# Altium PCB pcb.PcbDoc
Units mil, origin at the board's own origin, x right, y up, seen from the top; angles counter-clockwise.
Board outline 2095 x 2705 mil, 2 copper layers (Top Layer, Bottom Layer); 51 components, 35 nets, 174 pads, 0 vias.
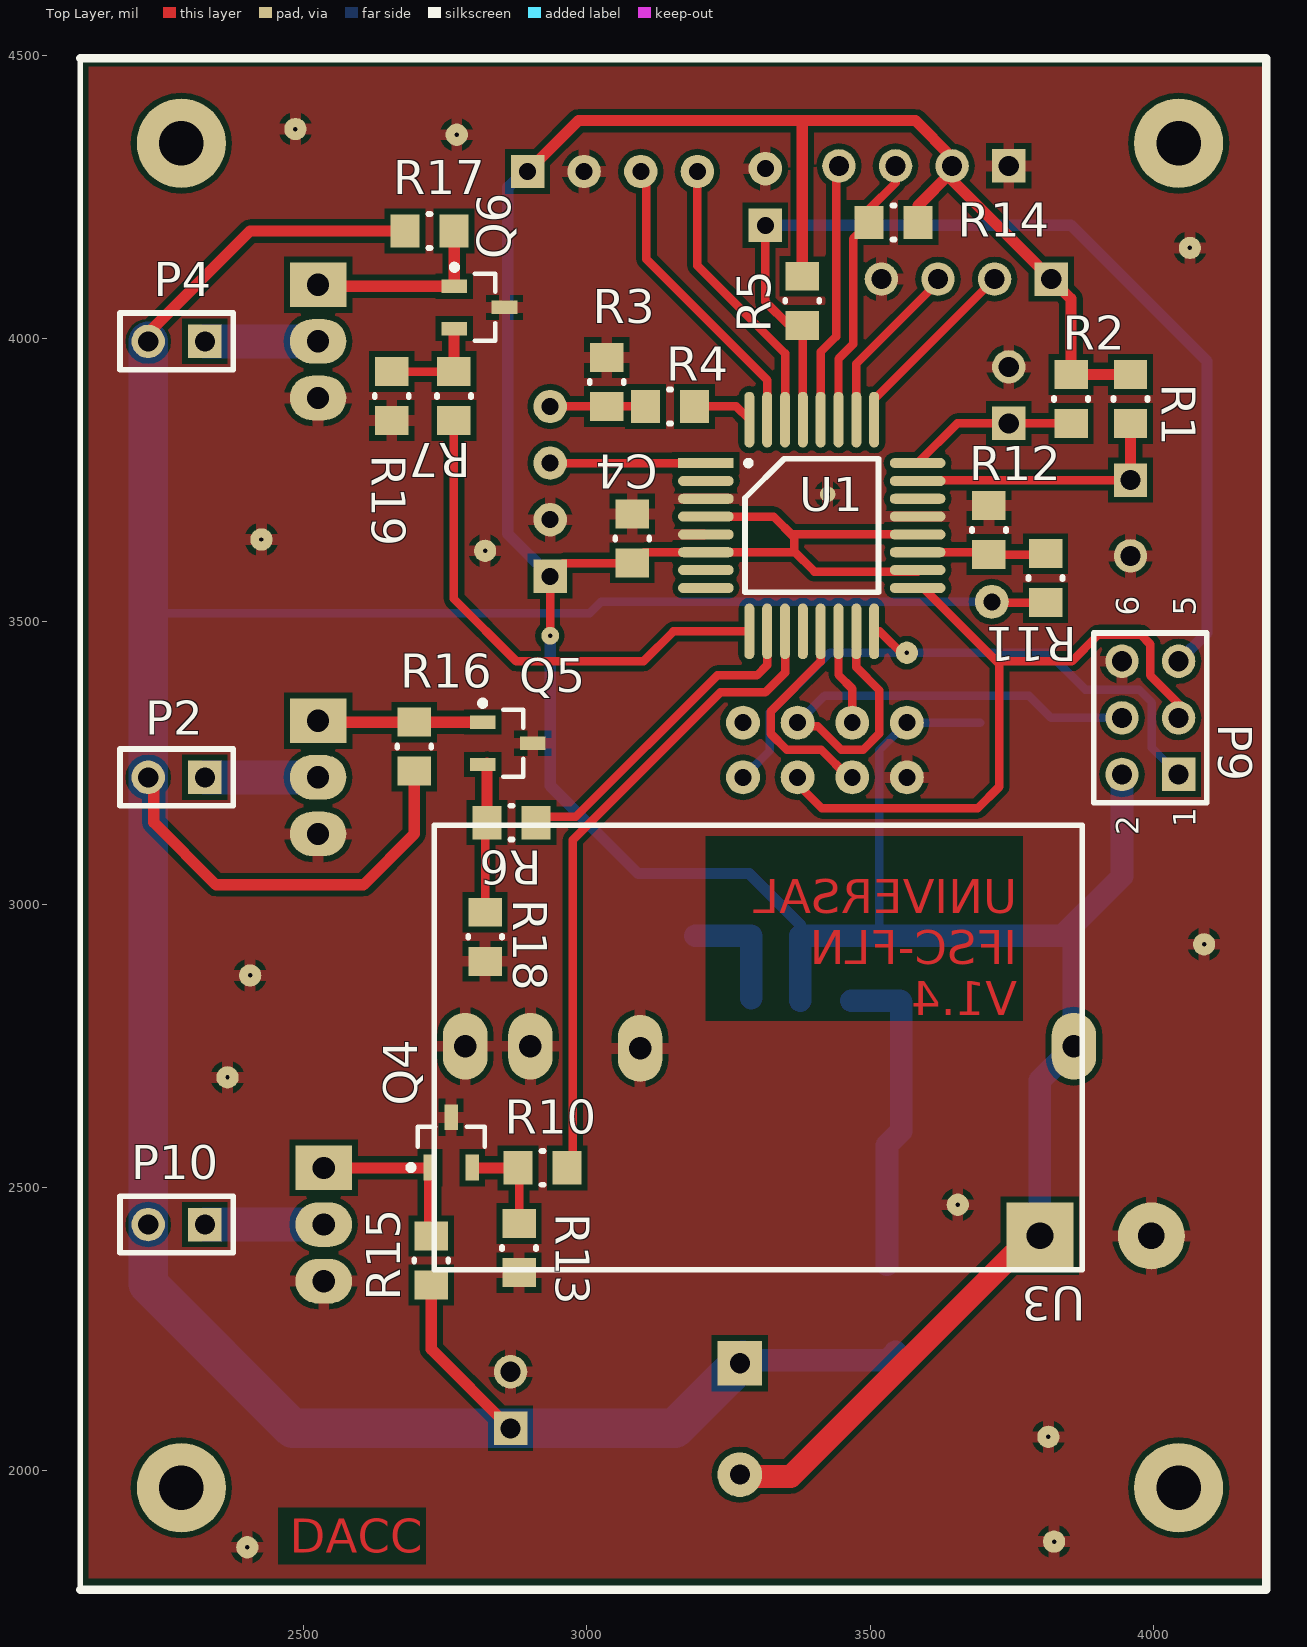
[diagram p0: Top Layer view]
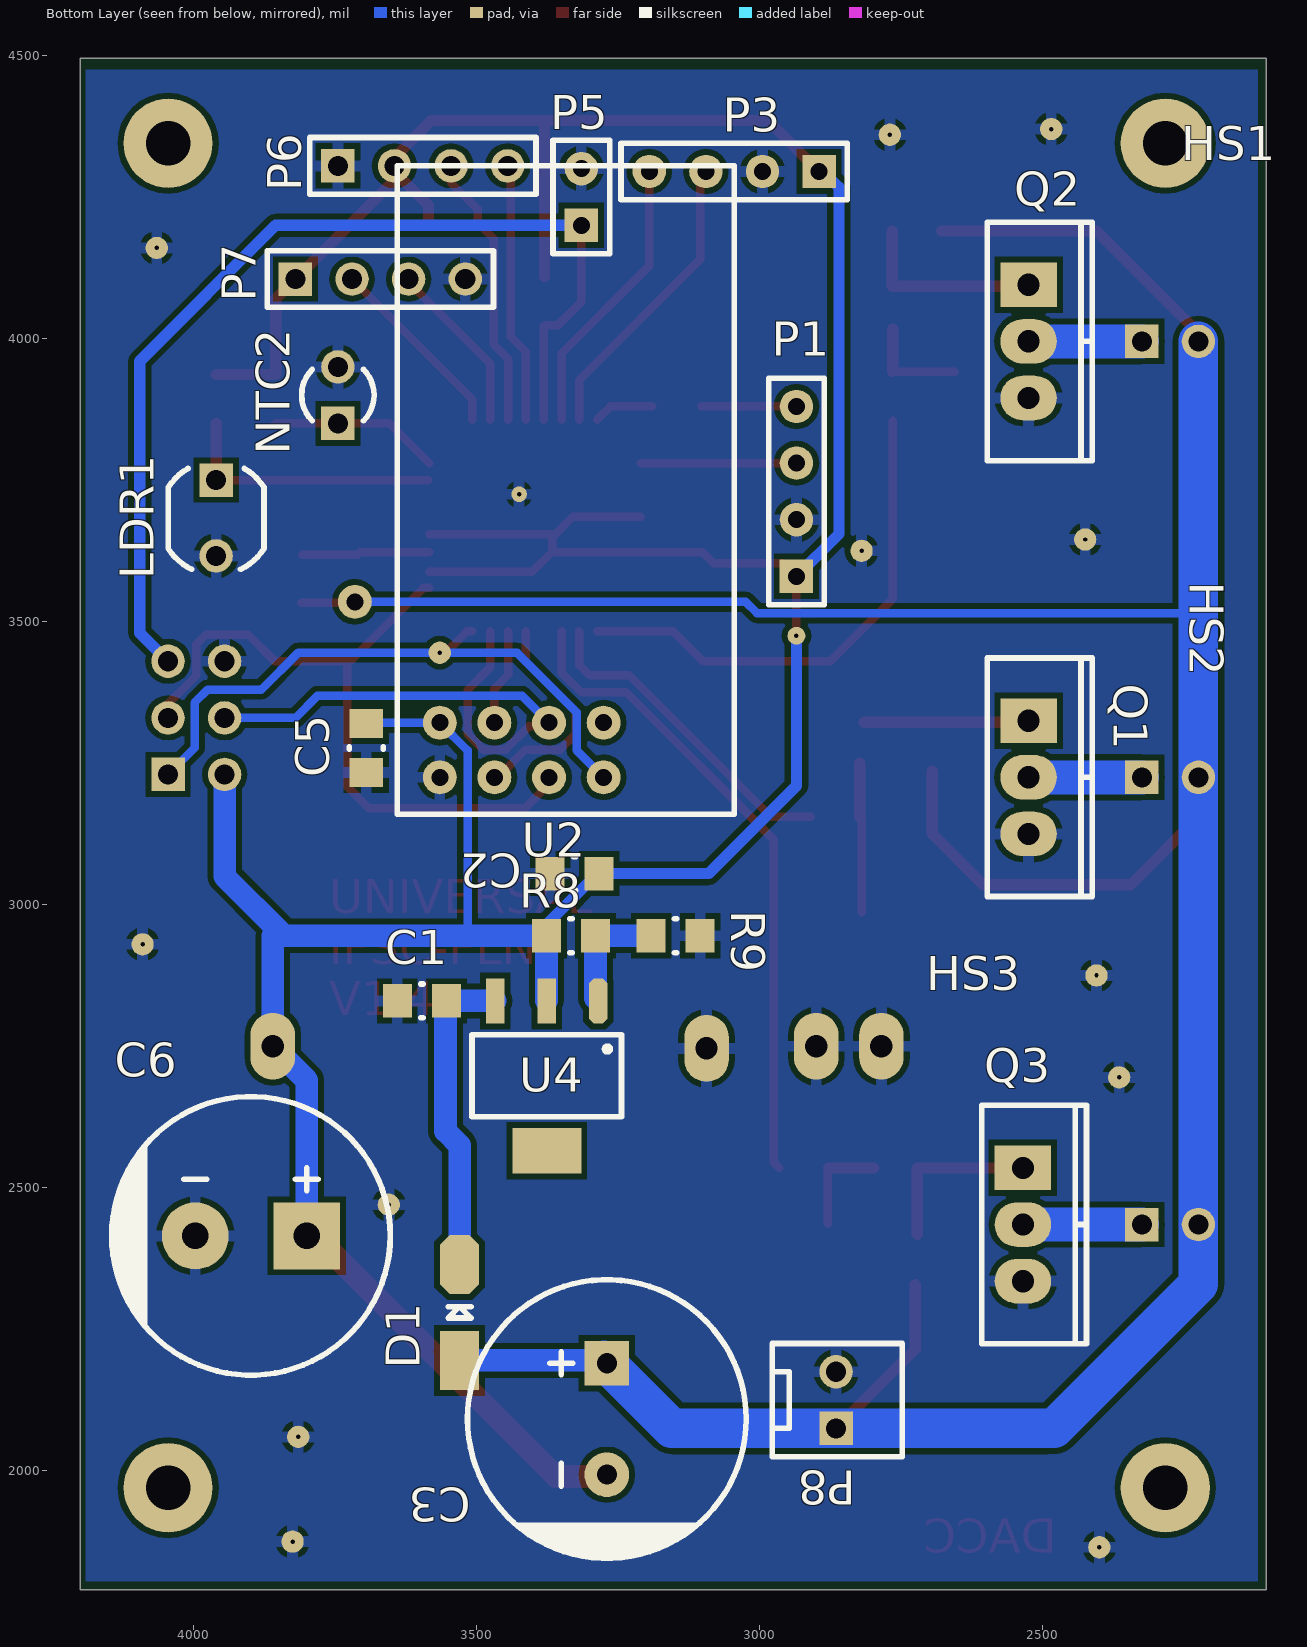
[diagram p1: Bottom Layer view, seen from below]
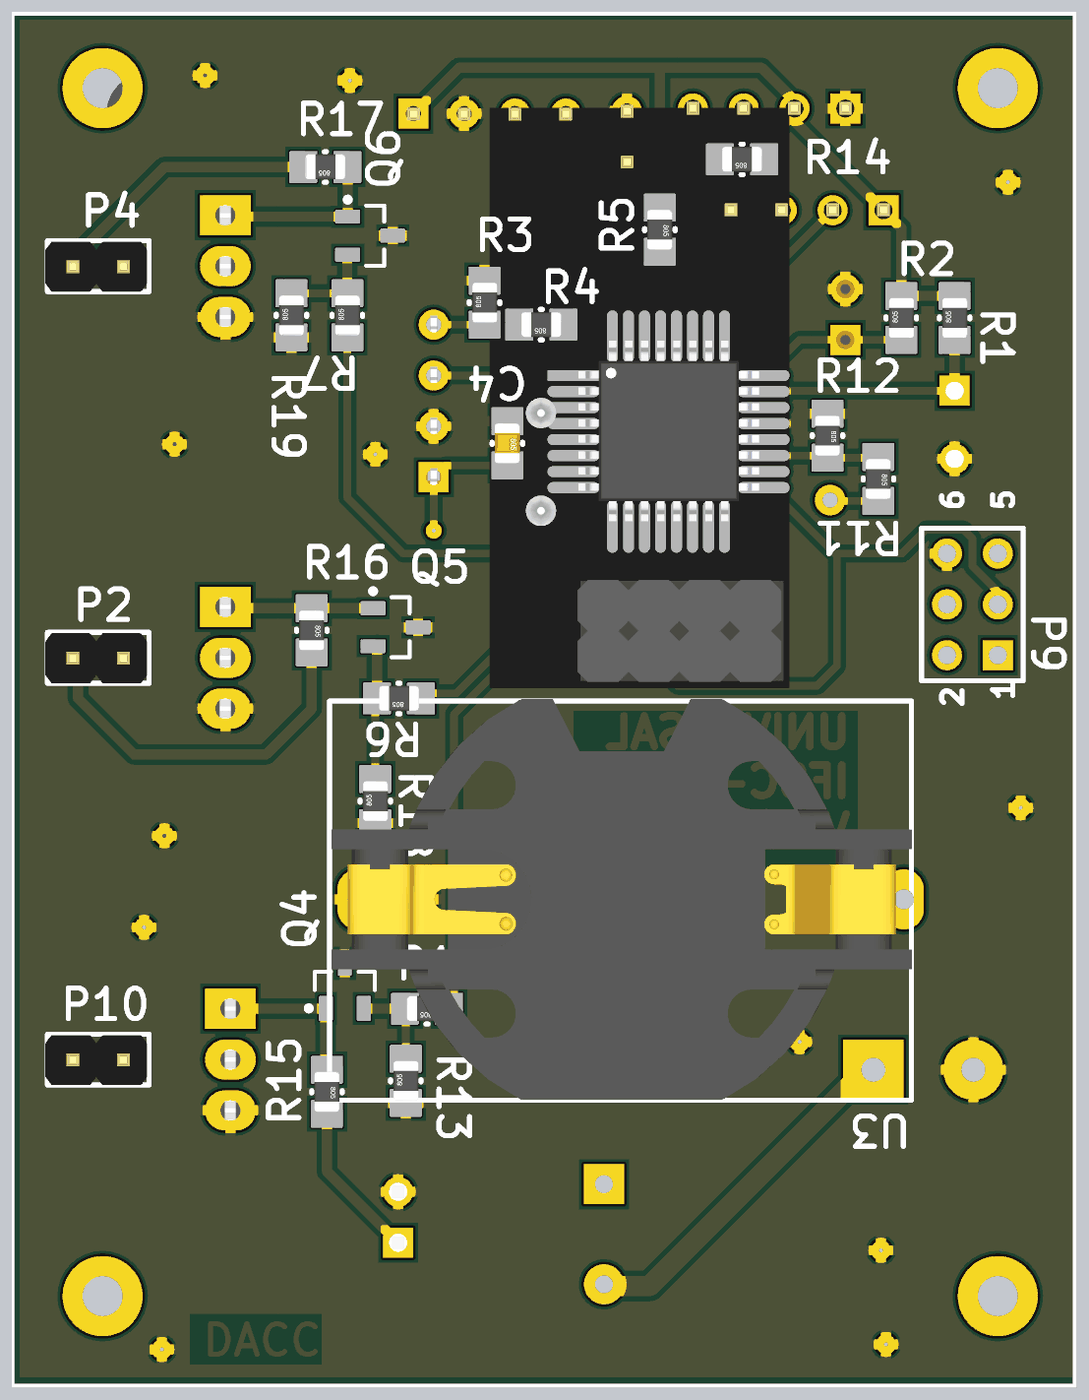
[diagram p2: 3D render of the assembled board from above, using the file's embedded part models]
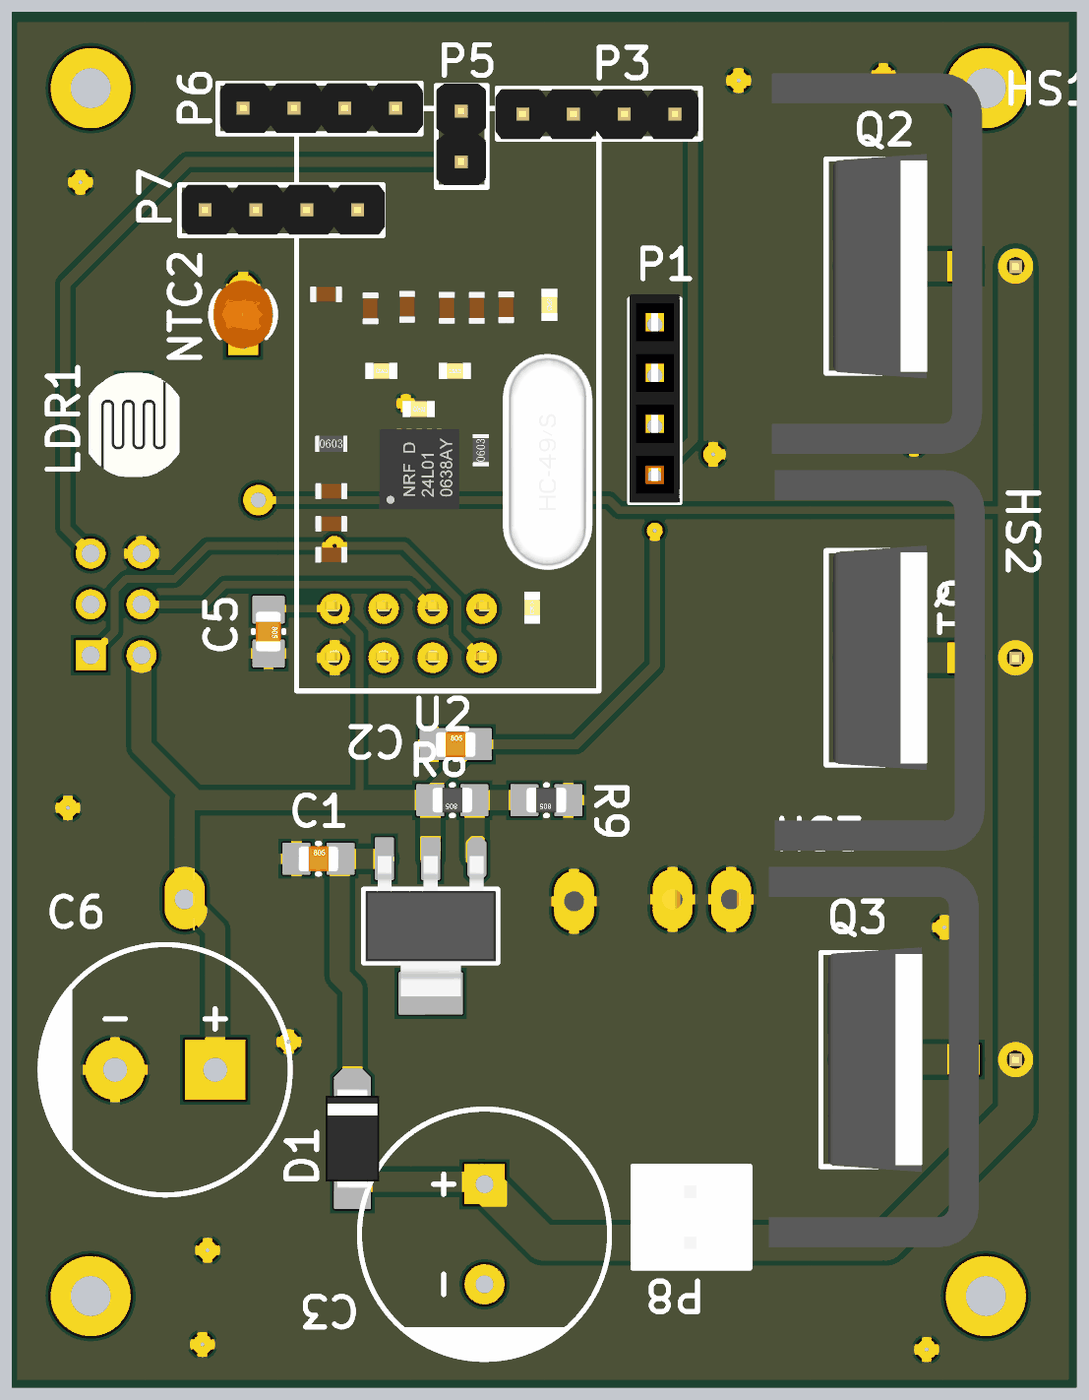
[diagram p3: 3D render of the assembled board from below, using the file's embedded part models]

## Layer stack, top to bottom
Top Solder: solder mask 0.4, Solder Resist, Dk 3.5
Top Layer: signal copper 1.4
Dielectric 1: dielectric 12.6, FR-4, Dk 4.8
Bottom Layer: signal copper 1.4
Bottom Solder: solder mask 0.4, Solder Resist, Dk 3.5

## Board outline
2105,1790 4200,1790 4200,4495 2105,4495

## Design rules (kind name [scope] priority, off if disabled: settings)
Clearance [All] p1: gap=10
DiffPairsRouting [All] p1: maxlimit=100 minlimit=10 mostfreqgap=10 toplayer_minwidth=15 toplayer_maxwidth=15 toplayer_prefwidth=15 bottomlayer_minwidth=15 bottomlayer_maxwidth=15 bottomlayer_prefwidth=15 maxuncoupledlength=500
NetAntennae [All] p1: netantennaetolerance=2
PasteMaskExpansion [All] p1: expansion=2
PlaneConnect [All] p1: planeconnectstyle=Relief reliefexpansion=20 reliefentries=4 reliefconductorwidth=20 reliefairgap=10
PolygonConnect [All] p1: connectstyle=Relief reliefconductorwidth=20 reliefentries=4 polygonreliefangle="90 Angle" airgapwidth=10
RoomDefinition schematic [InComponentClass('schematic')] p1: confinementstyle=ConfineIn formatcopy=TRUE lockcomponents=FALSE outline 7045,1060 7610,1060 7610,1380 7045,1380
RoutingVias [All] p1: holewidth=28 width=59.06 viastyle="Through Hole" minholewidth=28 minwidth=59.06 maxholewidth=28 maxwidth=59.06
SolderMaskExpansion [All] p1: expansion=5
Width [All] p1: maxlimit=60 minlimit=10 preferedwidth=15 minimp=50.000000 maximp=50.000000 favimp=50.000000
26 further rules are at their usual default settings.

## Components (designator, comment, footprint, x,y, rotation, side; value= is the part's Value field where it differs from the comment)
C1 "100nF" 0805C 3640,2830 r180 bottom
C2 "100nF" 0805C 3370,3055 r180 bottom
C3 "1000uF" CP-RAD-12.5mm-25.0mm-5.0mm 3270,2190 r270 bottom
C4 "100nF" 0805C 3080,3690 r270 top
C5 "100nF" 0805C 3695,3320 r270 bottom
C6 "1000uF" CP-RAD-12.5mm-40.0mm-5.0mm 3800,2415 r0 bottom
D1 "1N4007" DO-214AC 3530,2195 r90 bottom
HS1 "HS-TO-220" HS-TO-220-180847 2355,4000 r270 bottom
HS2 "HS-TO-220" HS-TO-220-180847 2350,3220 r270 bottom
HS3 "HS-TO-220" HS-TO-220-180847 2361.23,2440 r270 bottom
LDR1 "LDR" LDR-5mm 3960,3750 r270 bottom
NTC2 "NTC" Thermistor-100mil 3745,3850 r90 bottom
P1 "BLE" HDR-F-1x4-2.54mm-180-8.7mm 2935,3580 r90 bottom
P2 "PWM_1" HDR-M-1x2-2.54mm-180-9.2mm#1 2325,3225 r180 top
P3 "SERIAL" HDR-M-1x4-2.54mm-180-11.2mm#1 2895,4295 r0 bottom
P4 "PWM_2" HDR-M-1x2-2.54mm-180-9.2mm#1 2325,3995 r180 top
P5 "RESET" HDR-M-1x2-2.54mm-180-9.2mm#2 3315,4200 r90 bottom
P6 "I2C" HDR-M-1x4-2.54mm-180-11.2mm#2 3745,4305 r180 bottom
P7 "ADC" HDR-M-1x4-2.54mm-180-11.2mm#2 3820,4105 r180 bottom
P8 "SOURCE" KK-M-1x2-2.54mm-180 2865,2075 r90 bottom
P9 "ICSP" HDR-M-2x3-2.54mm-180-9.2mm 4045,3230 r90 top
P10 "PWM_1" HDR-M-1x2-2.54mm-180-9.2mm#1 2325,2435 r180 top
Q1 "MOSFET-N" TO-220/123 2525,3325 r270 bottom
Q2 "MOSFET-N" TO-220/123 2525,4095 r270 bottom
Q3 "MOSFET-N" TO-220/123 2535,2535 r270 bottom
Q4 "QNPN" SOT-23B_N 2760,2580 r90 top
Q5 "QNPN" SOT-23B_N 2860,3285 r0 top
Q6 "QNPN" SOT-23B_N 2810,4055 r0 top
R1 "1k" 0805R 3960,3850 r90 top
R2 "10k" 0805R 3855,3850 r90 top
R3 "0R" 0805R 3035,3880 r90 top
R4 "0R" 0805R 3190,3880 r180 top
R5 "10k" 0805R 3380,4110 r270 top
R6 "2k2R" 0805R 2910,3145 r180 top
R7 "2k2R" 0805R 2765,3855 r90 top
R8 "220R" 0805R 3290,2945 r0 bottom
R9 "360R" 0805R 3105,2945 r0 bottom
R10 "2k2R" 0805R 2965,2535 r180 top
R11 "Res" 0805R 3810,3620 r270 top
R12 "Res" 0805R 3710,3705 r270 top
R13 "10k" 0805R 2880,2350 r90 top
R14 "4k7" 0805R 3585,4205 r180 top
R15 "10k" 0805R 2725,2415 r270 top
R16 "10k" 0805R 2695,3322.4 r270 top
R17 "10k" 0805R 2765,4190 r180 top
R18 "10k" 0805R 2820,2900 r90 top
R19 "10k" 0805R 2655,3855 r90 top
U1 "ATmega328A-AU" TQFP32-7.0mm(0.8mm) 3210,3780 r0 top
U2 "nRF24l01" nRF24l01 3565,3225 r180 bottom
U3 "CR2032" CR2032 3445,3205 r180 top
U4 "LM317" SOT-223/4 3285,2830 r0 bottom

## Footprints (in the part's own frame and the unit in brackets; to place one, negate y for a bottom-side part, rotate by r counter-clockwise, add the part's x,y. Pads: shape width x height; smd on the part's side, far side on the other; paste and mask are expansions set on the pad)
0805C [mm] "Chip Capacitor; Body 2 x 1.3 mm (LxW typ)"
  rect 1.3x1.5 smd: 1(0,0) 2(2.2,0)
  silkscreen extent 1.05,-0.76 1.15,0.76, body extent 0.1,-0.64 2.1,0.61, height 0.78
0805R [mm] "Chip Resistor; Body 2 x 1.3 mm (LxW typ)"
  rect 1.3x1.5 smd: 1(0,0) 2(2.2,0)
  silkscreen extent 1.05,-0.76 1.15,0.76, body extent 0.1,-0.64 2.1,0.62, height 0.78
CP-RAD-12.5mm-25.0mm-5.0mm [mm] "Radial Capacitor; D 12.5mm; L 25.0mm; P 5.0mm"
  rect 2x2 hole 0.9: 1(0,0)
  round 2 hole 0.9: 2(5,0)
  silkscreen extent -3.75,-6.25 8.75,6.25
CP-RAD-12.5mm-40.0mm-5.0mm [mm] "Radial Capacitor; D 12.5mm; L 40.0mm; P 5.0mm"
  rect 3x3 hole 1.2: 1(0,0)
  round 3 hole 1.2: 2(5,0)
  silkscreen extent -3.75,-6.25 8.75,6.25
CR2032 [mm] "BATT"
  oval 2x3 hole 1: GND(16.764,11.557) VCC(-10.541,11.557)
  silkscreen extent -10.92,1.65 18.16,21.59, body extent -10.94,1.56 18.06,21.56, height 5.3
DO-214AC [mm] "DO-214AC, 3D: Leszek Madej"
  rect 2.65x1.75 smd: A(0,0)
  oct 2.65x1.75 smd: K(4.3,0)
  silkscreen extent 1.91,-0.51 2.41,0.51, body extent -0.35,-1.35 4.65,1.35, height 2.15
HDR-F-1x4-2.54mm-180-8.7mm [mm] "Female Header, 1 line 4 rows, 180 degrees, 8.7 mm length"
  rect 1.5x1.5 hole 0.762: 1(0,0)
  round 1.5 hole 0.762: 2(2.54,0) 3(5.08,0) 4(7.62,0)
  silkscreen extent -1.27,-1.25 8.89,1.25, body extent -1.27,-1.25 9.14,1.25, height 8.5
HDR-M-1x2-2.54mm-180-9.2mm#1 [mm] "Male Header, 1 line 2 rows, 180 degrees, 9.2 mm length"
  rect 1.5x1.5 hole 0.9: 1(0,0)
  round 1.5 hole 0.9: 2(2.54,0)
  silkscreen extent -1.27,-1.27 3.81,1.27, body extent -1.17,-1.22 3.91,1.27, height 6.2
HDR-M-1x2-2.54mm-180-9.2mm#2 [mm] "Male Header, 1 line 2 rows, 180 degrees, 9.2 mm length"
  rect 1.5x1.5 hole 0.762: 1(0,0)
  round 1.5 hole 0.762: 2(2.54,0)
  silkscreen extent -1.27,-1.27 3.81,1.27, body extent -1.17,-1.22 3.91,1.27, height 6.2
HDR-M-1x4-2.54mm-180-11.2mm#1 [mm] "Male Header, 1 line 4 rows, 180 degrees, 11.2 mm length"
  rect 1.5x1.5 hole 0.762: 1(0,0)
  round 1.5 hole 0.762: 2(2.54,0) 3(5.08,0) 4(7.62,0)
  silkscreen extent -1.27,-1.27 8.89,1.27, body extent -1.17,-1.22 8.99,1.27, height 8.2
HDR-M-1x4-2.54mm-180-11.2mm#2 [mm] "Male Header, 1 line 4 rows, 180 degrees, 11.2 mm length"
  rect 1.5x1.5 hole 0.9: 1(0,0)
  round 1.5 hole 0.9: 2(2.54,0) 3(5.08,0) 4(7.62,0)
  silkscreen extent -1.27,-1.27 8.89,1.27, body extent -1.17,-1.22 8.99,1.27, height 8.2
HDR-M-2x3-2.54mm-180-9.2mm [mm] "Male Header, 2 lines, 3 columns, 180 degrees, 9.2 mm length"
  rect 1.5x1.5 hole 0.9: 1(0,0)
  round 1.5 hole 0.9: 2(0,2.54) 3(2.54,0) 4(2.54,2.54) 5(5.08,0) 6(5.08,2.54)
  silkscreen extent -1.27,-1.27 6.35,3.81
HS-TO-220-180847 [mil] "Heatsink TO-220 180847 180847 19x9.5x19mm"
  body extent -374,-349 374,64, height 933
KK-M-1x2-2.54mm-180 [mm] "Molex KK Male Header, 2 rows, 180 degrees, 3D Andrew Mellor"
  rect 1.5x1.5 hole 0.9: 1(0,0)
  round 1.5 hole 0.9: 2(2.54,0)
  silkscreen extent -1.27,-2.97 3.81,2.87, body extent -1.27,-2.97 3.81,2.87, height 11.7
LDR-5mm [mm] "Light Dependant Resistor 5 mm; 3D Saeid Jorablo"
  rect 1.5x1.5 hole 0.9: 1(0,0)
  round 1.5 hole 0.9: 2(3.4,0)
  silkscreen extent -0.52,-2.15 4.01,2.15, body extent -0.91,-2.17 4.3,2.13, height 2.24
nRF24l01 [mil]
  round 60 hole 30: CE(96.46,0) CSN(96.46,96.46) GND(0,0) IRQ(289.37,96.46) MISO(289.37,0) MOSI(192.91,96.46) SCK(192.91,0) VCC(0,96.46)
  silkscreen extent -75,-65 520,1080, body extent -70,-60 520,1082, height 138
SOT-23B_N [mm] "SOT23, 3-Leads, Body 2.9x1.3mm, Pitch 0.95mm, Lead Span 2.4mm, IPC Medium Density"
  rect 1.15x0.6 smd: 1(-1.125,0.95) 2(-1.125,-0.95) 3(1.125,0)
  silkscreen extent -1.25,-1.5 0.7,1.92, body extent -0.7,-1.5 0.7,1.5, height 1.14
SOT-223/4 [mil] "SOT-223 DCY"
  oct 33x80 smd: 1(0,0)
  rect 33x80 smd: 2(91,0) 3(182,0)
  rect 122x80 smd: 4(91,264.69)
  silkscreen extent -41,60 223,205, body extent -37,-5 219,271, height 65
Thermistor-100mil [mm] "Thermistor 100 mil"
  rect 1.5x1.5 hole 0.9: 1(0,0)
  round 1.5 hole 0.9: 2(2.54,0)
  silkscreen extent 0.12,-1.63 2.42,1.63, body extent -0.41,-1.5 2.97,1.5, height 8
TO-220/123 [mm] "TO, Thru-Hole, Vertical, Heatsink Mounted; 3 In-Line Leads; Pitch 2.54 mm"
  rect 2x2.54 hole 1: 1(0,0)
  oval 2x2.54 hole 1: 2(2.54,0) 3(5.08,0)
  silkscreen extent -2.81,-1.85 7.89,2.85, body extent -3.07,-1.49 8.15,3.2, height 21.13
TQFP32-7.0mm(0.8mm) [mm] "Thin Quad Flat Pack 32 pin; 3D André L'Hérault"
  rect 2.5x0.45 smd: 1(0,0)
  oval 2.5x0.45 smd: 2(0,-0.8) 3(0,-1.6) 4(0,-2.4) 5(0,-3.2) 6(0,-4) 7(0,-4.8) 8(0,-5.6) 17(9.5,-5.6) 18(9.5,-4.8) 19(9.5,-4) 20(9.5,-3.2) 21(9.5,-2.4) 22(9.5,-1.6) 23(9.5,-0.8) 24(9.5,0)
  oval 0.45x2.5 smd: 9(1.95,-7.55) 10(2.75,-7.55) 11(3.55,-7.55) 12(4.35,-7.55) 13(5.15,-7.55) 14(5.95,-7.55) 15(6.75,-7.55) 16(7.55,-7.55) 25(7.55,1.95) 26(6.75,1.95) 27(5.95,1.95) 28(5.15,1.95) 29(4.35,1.95) 30(3.55,1.95) 31(2.75,1.95) 32(1.95,1.95)
  silkscreen extent 1.76,-5.79 7.74,0.19, body extent 0.25,-7.28 9.27,1.74, height 1.35

## Part data
C1 C2 C4 C5: library part Capacitor, "Capacitor"
C3 C6: library part Capacitor-Electrolytic, "Electrolytic Capacitor"
D1: library part RS1A, "1 A Fast Rectifier"
HS1 HS2 HS3: "Heatsink TO-220"
LDR1: "Ligh Dependant Resistor"
NTC2: "Negative Temperature Coefficient Thermistor"
P1 P3 P6 P7: library part Header_1x4, "Header, 1 Line, 4 Columns, 4 Pins"
P2 P4 P5 P10: library part Header_1x2, "Header, 1 Line, 2 Columns, 2 Pins"
P8: library part KK_1x2, "KK Header, 1 Line, 2 Columns, 2 Pins"
P9: library part Header_2x3, "Header, 2 Lines, 3 Columns, 6 Pins"
Q1 Q2 Q3: "N-Channel MOSFET"
Q4 Q5 Q6: "NPN Bipolar Transistor"
R1 R2 R3 R4 R5 R6 R7 R8 R9 R10 R13 R14 R15 R16 R17 R18 R19: library part Resistor, "Resistor"
R11 R12: library part Res1, "Resistor"
U1: "8-bit AVR Microcontroller with 32 KB In-System Programmable Flash"
U4: "3-Terminal 1.5 A Positive Adjustable Voltage Regulator"

## Free pads (board coordinates)
  round 39.37 hole 7.87: 2(3565,3445) 11(2365,2695) 11(2400,1865) 11(2405,2875) 11(2425,3645) 11(2485,4370) 11(3655,2470) 11(3815,2060) 11(3825,1875) 11(4065,4160) 11(4090,2930) 13(2820,3625) 14(2770,4360)
  round 60 hole 30: 9(3715,3535)
  round 31.5 hole 7.87: 10(2935,3475)
  oval 78.74x118.11 hole 39.37: 11(3093.83,2746.17) 17(2900,2750)
  round 157.48 hole 78.74: 15(2283.46,1970) 15(2283.46,4345) 15(4045,1970) 15(4045,4345)
  round 27.56 hole 7.87: 16(3425,3725)

## Nets (pads, with @x,y where several pads share a name; then routed paths per layer and width w, separated by ;. In a path a pad name is that pad's centre, name@x,y a point inside that pad or via, vN(x,y) a via of type N, cw(c..) or ccw(c..) an arc to the next point about the centre after c; other vN are vias at no path point)
3V3: C2.2 C3.2 C4.2 C5.1 C6.1 P1.1 P3.1 P6.2 P7.1 P9.2 pad.10 R1.2 R2.2 R5.1 R8.2 R14.1 U1.4 U1.6 U1.18 U1.20 U2.VCC U3.VCC U4.2 | length 7270.4
  Top Layer w15: pad.10 P1.1 2958.39,3603.39 C4.2 3081.77,3603.39 3100.91,3622.52 U1.6 3365.98,3622.52 ; U1.4 3329.49,3685.51 3365.98,3649.02 3365.98,3624.02 3401.61,3588.39 U1.18@3584.02,3588.39 ; 3365.98,3654.02 U1.20 ; P6.2@3645,4280 P6.2 ; P6.2@3645,4295 P6.2 ; P6.2@3645,4320 P6.2
  Top Layer w20: P3.1 2985,4385 3580,4385 P6.2@3645,4320 ; R5.1 3380,4385 ; R14.1 3585,4235 P6.2@3645,4295 ; P6.2@3645,4280 P7.1 3855,4070 R2.2 R1.2
  Top Layer w40: C3.2@3270,1990 3360,1990 3785,2415 C6.1
  Bottom Layer w15: U4.2 U4.2@3376.61,2830.61 ; 3516.04,2945 3516.04,3272.5 U2.VCC C5.1@3695,3321.46
  Bottom Layer w20: P3.1@2887.97,4295 2860,4267.03 2860,3655 P1.1 ; pad.10 2935,3210 3090,3055 C2.2 3286.6,3055 3376.61,2964.98 R8.2
  Bottom Layer w40: U4.2@3376.61,2830.61 R8.2 3516.04,2945 3840,2945 3945,3050 P9.2 ; C6.1 3800,2690 U3.VCC 3860,2945
GND: C1.1 C2.1 C4.1 C5.2 C6.2 LDR1.2 NTC2.2 P1.2 P3.2 P5.2 P6.1 P7.4 P8.2 P9.6 pad.11 pad.13 pad.14 pad.16 pad.17 Q1.3 Q2.3 Q3.3 Q4.3 Q5.3 Q6.3 R3.2 R9.1 R12.1 R13.1 R18.1 R19.1 U1.3 U1.5 U1.21 U2.GND U3.GND
NetC1_2: C1.2 D1.K U4.3 | length 560.8
  Bottom Layer w40: U4.3 C1.2 ; D1.K 3530,2575 3555,2600 C1.2@3555,2828.39
NetLDR1_1: LDR1.1 R1.1 U1.23 | length 474.5
  Top Layer w15: U1.23@3585.51,3750 LDR1.1
  Top Layer w20: LDR1.1 R1.1
NetNTC2_1: NTC2.1 R2.1 U1.24 | length 303.5
  Top Layer w15: U1.24 3654.02,3850 3730,3850 R2.1 R2.1@3857.5,3847.5
NetP1_3: P1.3 U1.1 | length 275
  Top Layer w15: P1.3 U1.1
NetP1_4: P1.4 R3.1 R4.2 | length 168.4
  Top Layer w15: P1.4 R3.1 R4.2
NetP2_1: P2.1 Q1.2 | length 200
  Bottom Layer w60: P2.1 Q1.2
NetP3_3: P3.3 U1.31 | length 530.7
  Top Layer w15: P3.3 3105,4285 3105,4140 3318.27,3926.73 U1.31
NetP3_4: P3.4 U1.30 | length 502.3
  Top Layer w15: P3.4 3195,4128.52 3349.76,3973.76 U1.30
NetP4_1: P4.1 Q2.2 | length 200
  Bottom Layer w60: P4.1 Q2.2
NetP5_1: P5.1 P9.5 R5.2 U1.29 | length 1818.6
  Top Layer w15: P5.1@3305,4200 3315,4190 3315,4065 3356.61,4023.39 R5.2 3381.26,4022.13 U1.29
  Bottom Layer w20: P5.1 3855,4200 4095,3960 4095,3480 P9.5
NetP6_3: P6.3 R14.2 U1.27 | length 490
  Top Layer w15: U1.27 3444.25,3964.25 3470,3990 3470,4176.61 R14.2 3498.39,4228.39 3545,4275 P6.3
NetP6_4: P6.4 U1.28 | length 458.7
  Top Layer w15: U1.28 3412.76,3976.28 3440,4003.52 3440,4290 P6.4@3450,4300
NetP7_2: P7.2 U1.25 | length 336.4
  Top Layer w15: U1.25 3507.24,3892.24 P7.2
NetP7_3: P7.3 U1.26 | length 308
  Top Layer w15: U1.26 3475.75,3955.75 3620,4100 P7.3
NetP9_1: P9.1 pad.2 U1.16 U2.MISO | length 1123.3
  Top Layer w15: U1.16 3517.24,3482.76 3565,3435 pad.2
  Bottom Layer w15: U2.MISO 3323.13,3272.5 3323.13,3339.68 3428.45,3445 pad.2 3815,3445 3880,3380 3975,3380 3997.97,3357.03 3997.97,3277.03 P9.1
NetP9_3: P9.3 U1.17 U2.SCK | length 1267.4
  Top Layer w15: U2.SCK 3372.09,3212.91 3415,3170 3690,3170 3728.23,3208.23 3728.23,3430 3856.48,3430 3903.51,3477.03 3977.97,3477.03 3995,3460 3995,3405 4045,3355 P9.3 ; U1.17 3594,3559.53 3728.23,3425.3
NetP9_4: P9.4 U1.15 U2.MOSI | length 986.3
  Top Layer w15: U2.MOSI 3377.82,3327.18 3390,3315 3407.82,3315 3448.87,3273.96 3488.22,3273.96 3516.04,3301.78 3516.04,3378.97 3475.75,3419.27 U1.15
  Bottom Layer w15: U2.MOSI 3419.59,3368.96 3781.04,3368.96 3820,3330 P9.4
NetP10_1: P10.1 Q3.2 | length 210
  Bottom Layer w60: P10.1 Q3.2
NetQ1_2: Q1.1 Q5.1 R16.1 | length 288.1
  Top Layer w20: Q1.1@2527.6,3322.4 Q5.1
NetQ2_2: Q2.1 Q6.1 R17.1 | length 335
  Top Layer w20: Q2.1@2527.6,4092.4 Q6.1 R17.1@2765.71,4189.29
NetQ3_2: Q3.1 Q4.1 R15.1 | length 307.2
  Top Layer w15: Q3.1 Q3.1@2537.4,2537.4
  Top Layer w20: Q3.1 2721.89,2535 R15.1@2721.89,2418.11
NetQ4_2: Q4.2 R10.2 R13.2 | length 177
  Top Layer w15: R13.2 R10.2@2880,2533.39
  Top Layer w20: Q4.2@2798.11,2535 R10.2
NetQ5_2: Q5.2 R6.2 R18.2 | length 260.3
  Top Layer w15: R18.2 R6.2@2820,3151.61
  Top Layer w20: R6.2@2823.39,3155 Q5.2@2823.39,3250.28
NetQ6_2: Q6.2 R7.2 R19.2 | length 185.3
  Top Layer w15: R19.2 R7.2
  Top Layer w20: R7.2 Q6.2@2765,4016.89
NetR4_1: R4.1 U1.32 | length 106.4
  Top Layer w15: R4.1 3263.54,3880 U1.32
NetR6_1: R6.1 U1.10 | length 578.9
  Top Layer w15: R6.1@2910,3155 2980,3155 3230,3405 3300,3405 3318.27,3423.27 U1.10
NetR7_1: R7.1 U1.9 | length 904.2
  Top Layer w15: R7.1 2765,3540 2875,3430 3100,3430 3152.76,3482.76 U1.9
NetR8_1: R8.1 R9.2 U4.1 | length 208.4
  Bottom Layer w40: R9.2 R8.1 U4.1@3290,2835
NetR10_1: R10.1 U1.11 | length 1153.8
  Top Layer w15: R10.1 2975,2545 2975,3114.64 3235.36,3375 3315,3375 3349.76,3409.76 U1.11
NetR11_1: R11.1 R12.2 U1.19 | length 226.1
  Top Layer w15: U1.19 3705.87,3622.52 R12.2 R11.1@3808.39,3618.39
NetU1_13: U1.13 U2.CE | length 387.2
  Top Layer w15: U1.13 3412.76,3429.3 3324.59,3341.13 3324.59,3301.78 3352.41,3273.96 3413.51,3273.96 U2.CE@3462.47,3225
NetU1_14: U1.14 U2.CSN | length 171.4
  Top Layer w15: U1.14 3444.25,3405.75 3468.54,3381.46 U2.CSN
VIN: C3.1 D1.A P2.2 P4.2 P8.1 P10.2 pad.9 R11.2 R15.2 R16.2 R17.2 | length 6321.2
  Top Layer w15: pad.9@3716.61,3533.39 R11.2
  Top Layer w20: P4.2 2225,4010 2405,4190 R17.2 ; P2.2@2235,3225 2235,3145 2345,3035 2605,3035 2695,3125 R16.2 ; R15.2 2725,2215 P8.1
  Bottom Layer w15: 2220,3515 3005,3515 3025,3535 pad.9
  Bottom Layer w40: C3.1@3275,2195 D1.A D1.A@3545,2210
  Bottom Layer w70: P4.2 P10.2 2225,2330 2480,2075 ; 2490,2075 P8.1 3155,2075 C3.1@3275,2195
pads on no net: U1.2 U1.7 U1.8 U1.12 U1.22 U2.IRQ U4.4

## Polygon pours and split planes (outlines as drawn)
GND on Top Layer "Top Layer-No Net" (solid, pour order 0): 2120,4480 2120,1810 4200,1810 4200,4480
GND on Bottom Layer "Top Layer-No Net" (solid, pour order 2): 2120,4475 2120,1805 4190,1805 4190,4475

## Other copper
Top Layer:
  text "UNIVERSAL / IFSC-FLN / V1.4" at 3760,2805 h60
  text "DACC" at 2475,1855 h60

## Silkscreen, mask and mechanical layers (free items; w line width, h text height)
Top Overlay:
  the board outline again, w10

## Text inside footprints (layer, text, board x,y; h text height)
P9: Top Overlay "2" at 3975,3123 h40 r90; Top Overlay "1" at 4075,3137 h40 r90; Top Overlay "5" at 4075,3510 h40 r90; Top Overlay "6" at 3975,3510 h40 r90